# EAGLE board OPEnS-Power-1.0.0 (EAGLE 9.2.0)
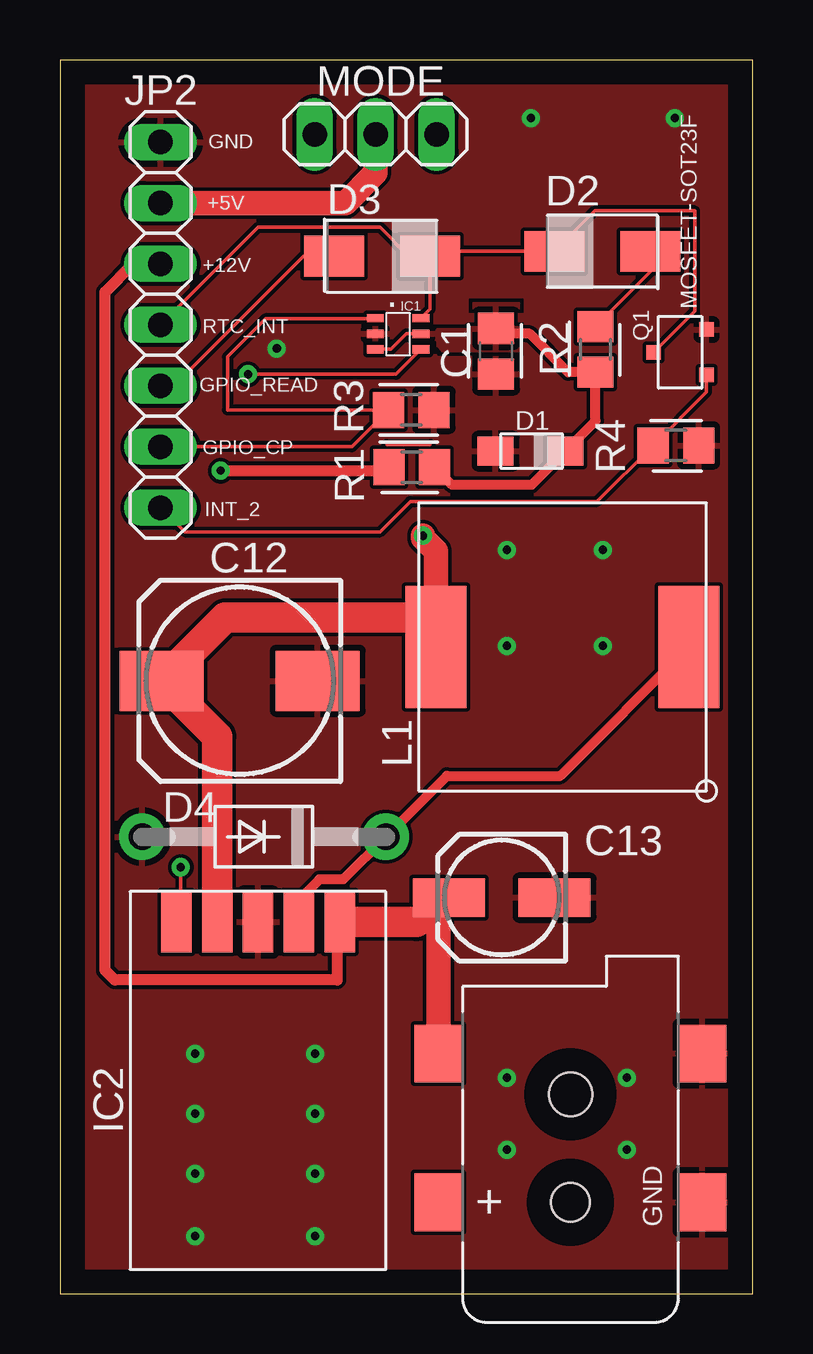
[diagram p0: board, top side]
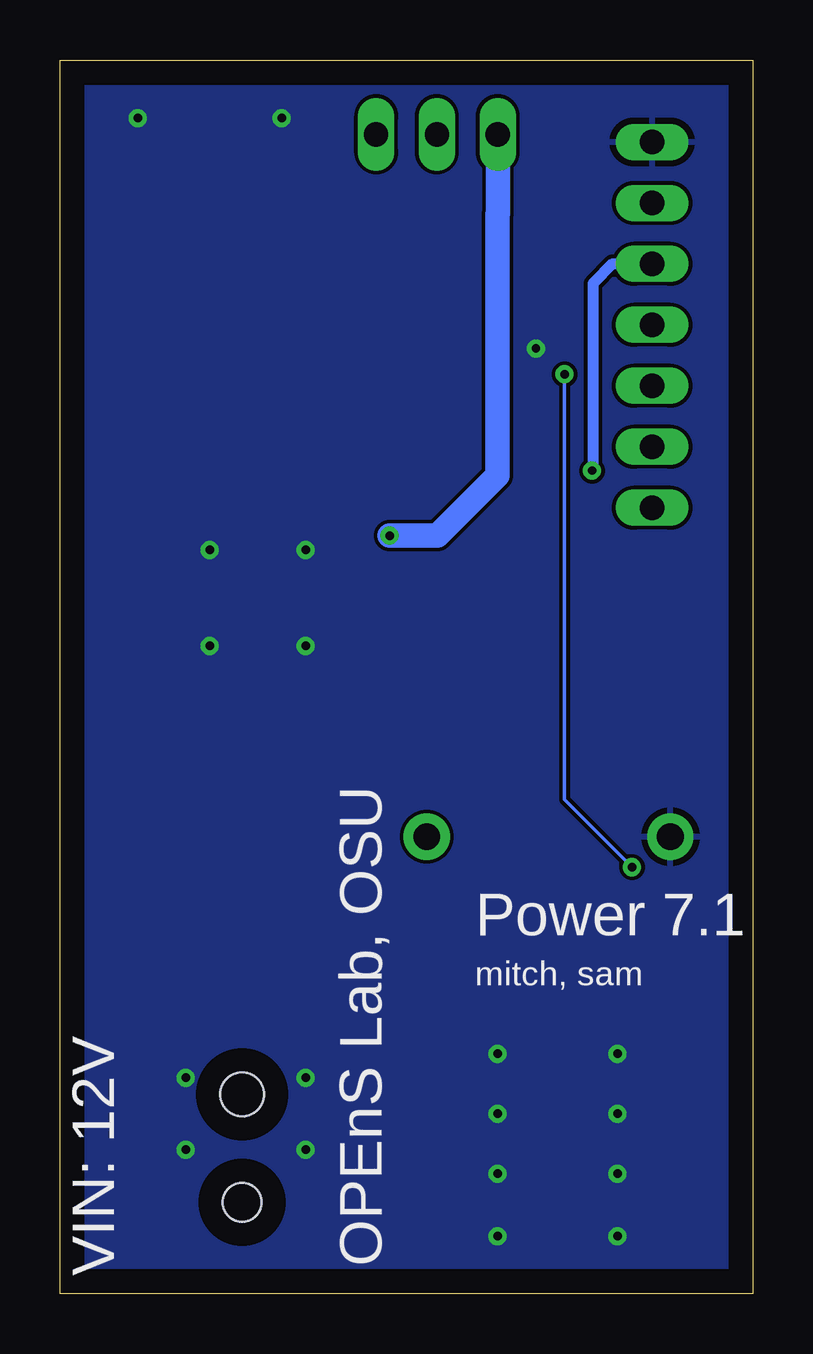
[diagram p1: board, bottom side, seen from below]

Size 28.88 x 51.42 mm. Coordinates in mm from the lower left corner, seen from the top.
Outline: 0,0 28.88,0 28.88,51.42 0,51.42 0,0
Copper layers (1*16): Top 0.035mm / dielectric 1.5mm / Bottom 0.035mm
Design rules "default": minimum track width 6mil, minimum drill 0.35mm, track to track 6mil, track to pad 6mil, pad to pad 6mil, via to via 6mil, smd to smd 6mil, copper to edge 40mil, drill to drill 6mil, minimum pad ring 10mil, minimum via ring 8mil, stop-mask expansion 4mil, vias tented up to drill 0mil, thermal gap 10mil
Net classes: 1 12v: width 0.457 mm, clearance 0.305 mm; 2 5v: width 0.406 mm, clearance 0.305 mm; 3 sig: width 0.152 mm, clearance 0.152 mm

## Footprints (pad centres in the part's own frame; a part is rotated, then mirrored left to right if it is on the bottom)
DCJACK_2MM_SMT = smd 2.4 x 2: GND 0,-5.5; GNDBREAK 6.2,-5.5; PWR1 0,5.5; PWR2 6.2,5.5 | hole 1.6: 0,0 | hole 1.8: 4.5,0
C0805 = smd 1.3 x 1.5: 1 -0.95,0; 2 0.95,0
153CLV-0810 = smd 3.5 x 2.5: + 3.25,0; - -3.25,0
153CLV-0505 = smd 3 x 1.6: + 2.2,0; - -2.2,0
DO-219AC = smd 1.5 x 1.2: BCK 2.9,0; FNT 0,0
DIODE-DO-214AC = smd 2.5 x 1.7: BCK 2,0; FNT -2,0
DO41-10 = drill 1.118 pad 1.93: A 5.08,0; C -5.08,0
SC70 = smd 0.7 x 0.35: C_ 0.95,1.3; CP -0.95,1.3; D -0.95,0; GND -0.95,0.65; Q 0.95,0; VCC 0.95,0.65
TO-263 = smd 1.27 x 2.54: FB 1.702,1.016; GND 0,1.016; STATE 3.404,1.016; VIN -3.404,1.016; VOUT -1.702,1.016
1X07 = drill 1.016 long: 1 -7.62,0; 2 -5.08,0; 3 -2.54,0; 4 0,0; 5 2.54,0; 6 5.08,0; 7 7.62,0
12-12 = smd 5.08 x 2.54: A 0,-5.27; B 0,5.27
1X03 = drill 1.016 long: 1 -2.54,0; 2 0,0; 3 2.54,0
SOT-23F = smd 0.6 x 0.6: D 0,1.1; G -0.95,-1.1; S 0.95,-1.1
R0805 = smd 1.3 x 1.5: 1 -0.95,0; 2 0.95,0

## Placement (x,y rotation side)
12V_IN  2.1MMJACKSMT  [DCJACK_2MM_SMT]  21.29,3.81 90 top
C1  100nF  [C0805]  18.18,39.29 270 top
C12  470 uF  [153CLV-0810]  7.49,25.54 180 top
C13  0  [153CLV-0505]  18.42,16.51 180 top
D1  4.3V  [DO-219AC]  21.07,35.12 180 top
D2  [DIODE-DO-214AC]  22.61,43.45 180 top
D3  [DIODE-DO-214AC]  13.43,43.25 0 top
D4  0  [DO41-10]  8.51,19.05 180 top
IC1  NC7SZ175  [SC70]  14.1,39.36 0 top
IC2  LM2575  [TO-263]  8.26,16.51 180 top
JP2  [1X07]  4.19,40.39 270 top
L1  L471  [12-12]  20.96,26.96 90 top
MODE  [1X03]  13.16,48.33 0 top
Q1  MOSFET-SOT23F  [SOT-23F]  25.86,39.24 90 top
R1  128k  [R0805]  14.67,34.45 180 top
R2  300k  [R0805]  22.32,39.36 270 top
R3  10k  [R0805]  14.65,36.84 180 top
R4  10k  [R0805]  25.68,35.36 180 top

## Library data of the parts
12V_IN C13 D4 = adafruit
C1 = eagle-ltspice; SPICEMODEL: NONE; SPICEPREFIX: C
C12 = rcl; SPICEPREFIX: C
D1-D3 IC1 Q1 = beach
IC2 L1 = LM2575
JP2 MODE = pinhead
R1-R4 = resistor

## Nets
5_RAW [5v]: C12.+ IC2.FB L1.B MODE.1
+5V [5v]: JP2.2 MODE.2
+12V: 12V_IN.PWR2 C13.+ IC2.VIN JP2.3 R1.2
EN_ [sig]: IC1.Q IC2.STATE
GND: 12V_IN.GND 12V_IN.GNDBREAK C1.2 C12.- C13.- D1.BCK D4.A IC1.GND IC2.GND JP2.1 Q1.S R3.1 R4.1
GPIO_CP [sig]: IC1.CP JP2.6 R3.2
GPIO_READ [sig]: D3.FNT JP2.5
INT_2: JP2.7 Q1.G R4.2
N$1 [5v]: D4.C IC2.VOUT L1.A
N$2 [sig]: C1.1 D1.FNT IC1.D IC1.VCC R1.1 R2.2
N$4: D2.FNT R2.1
RTC_INT [sig]: D2.BCK D3.BCK IC1.C_ JP2.4 Q1.D

## Tracks (layer width: path | path; a pad name or v marks a point on that pad's centre or on a via)
5_RAW  (via drill 0.35)
  Top 0.406: 4.45,25.75 C12.+ | 15.88,26.96 L1.B
  Top 1.016: v15.13,31.6 15.13,31.5 15.69,30.95 L1.B 15.69,27.88 16,28.19
  Top 1.27: IC2.FB 6.55,23.23 C12.+ 6.89,28.19 16,28.19
  Bottom 1.016: v15.13,31.6 13.13,31.6 10.63,34.1 10.63,45 10.62,45.01 MODE.1
+5V
  Top 1.016: JP2.2 11.9,45.47 13.16,46.73 MODE.2
+12V  (via drill 0.35)
  Top 0.457: IC2.VIN 11.56,15.39 11.56,13.08 2.29,13.08 1.88,13.49 1.88,41.76 3.05,42.93 JP2.3 | v6.7,34.31 13.57,34.31 R1.2
  Top 1.016: 12V_IN.PWR2 15.79,16.08 C13.+ 15.88,16.51 14.86,15.49
  Top 1.27: 14.86,15.49 IC2.VIN
  Bottom 0.152: 5.33,42.93 JP2.3
  Bottom 0.457: 6.68,34.29 v6.7,34.31 6.66,34.35 6.66,42.11 5.84,42.93 JP2.3
EN_  (via drill 0.35)
  Top 0.152: v5.03,17.78 5.03,15.68 IC2.STATE | v7.84,38.33 14.01,38.33 IC1.Q
  Bottom 0.152: v7.84,38.33 7.84,20.59 v5.03,17.78
GND  (via drill 0.35)
  other vias: 5.63,7.5 5.63,10 10.63,10 10.63,7.5 10.63,5 18.64,6 23.64,6 23.64,9 18.64,9 18.64,27 22.64,27 22.64,31 18.64,31 19.64,49 25.64,49 9.04,39.4 5.63,5 5.63,2.4 10.63,2.4
  pour Top (rank 2): 0,51.44 29.21,51.44 29.21,0 0,0 0,1.27
  pour Bottom: 0,51.44 29.21,51.44 29.21,0 0,0 0,0.64
GPIO_CP
  Top 0.152: IC1.CP 13.12,40.64 8.57,40.64 6.98,39.05 6.98,36.84 R3.2 12.17,35.31 JP2.6
GPIO_READ
  Top 0.152: D3.FNT 10.16,43.25 4.76,37.85 JP2.5
INT_2
  Top 0.152: JP2.7 4.75,32.21 4.77,32.21 5.22,31.75 13.33,31.75 14.61,33.02 22.39,33.02 R4.2 26.96,37.59 Q1.G
N$1
  Top 0.406: L1.A 20.86,21.59 16.13,21.59 D4.C 11.81,17.27 10.81,17.27 9.94,16.4 9.94,15.52 IC2.VOUT
N$2
  Top 0.152: IC1.D 13.8,39.36 14.45,40.01 IC1.VCC
  Top 0.406: C1.1 17.96,40.01 19.58,40.01 21.19,38.41 R2.2 22.32,36.38 D1.FNT 19.66,33.72 16.35,33.72 R1.1
  pour Top: 14.73,39.9 15.54,39.9 15.63,39.8 15.73,39.7 15.73,39.5 15.94,39.3 19.14,39.3 19.14,41.3 17.24,41.3 17.24,40.4 17.04,40.2 15.94,40.2 15.73,40.2 15.63,40.1 14.94,40.1
N$3
  Top 0.15: 13.63,35.4 15.44,35.4
N$4
  Top 0.152: D2.FNT 24.61,42.6 R2.1
RTC_INT
  Top 0.152: IC1.C_ 15.43,41.05 D3.BCK | D3.BCK 15.63,43.45 D2.BCK 22.31,45.14 26.47,45.14 26.47,40.95 Q1.D | JP2.4 8.26,44.45 13.33,44.45 14.54,43.25 D3.BCK

## Text on the board
tPlace: GND | +5V | +12V | RTC_INT | GPIO_READ | GPIO_CP | INT_2
bPlace: Power 7.1 | mitch, sam | OPEnS Lab, OSU | VIN: 12V